# EAGLE board heart-pcb-schaltung (EAGLE 9.7.0)

Size 221.15 x 68.41 mm. Coordinates in mm from the lower left corner, seen from the top.
Outline: 0,0 221.15,0 221.15,68.41 0,68.41 0,0
Copper layers (1*16): Top 0.035mm / dielectric 1.5mm / Bottom 0.035mm
Design rules "default": minimum track width 6mil, minimum drill 0.35mm, track to track 6mil, track to pad 6mil, pad to pad 6mil, via to via 6mil, smd to smd 6mil, copper to edge 40mil, drill to drill 6mil, minimum pad ring 10mil, minimum via ring 8mil, stop-mask expansion 4mil, vias tented up to drill 0mil, thermal gap 10mil

## Footprints (pad centres in the part's own frame; a part is rotated, then mirrored left to right if it is on the bottom)
BAT_3002 = smd 3.96 x 3.96: N 0,0.65 | smd 5.08 x 5.08: P 12.825,0.65; P1 -12.825,0.65
BATTERY-GENERIC = drill 1.118 pad 3.15 octagon: + 2.54,0; - -2.54,0
LEDRD254W60D565H860B = drill 0.981 pad 1.581: 1 -1.27,0; 2 1.27,0
MOTOR = drill 1.118 pad 3.15 octagon: + 2.54,0; - -2.54,0
RESAD1016W63L850D250B = drill 0.83 pad 1.43: 1 -5.08,0; 2 5.08,0
DIP787W55P254L958H533Q8B-8P3 = drill 0.852 pad 1.452: 1 -3.81,3.81; 2 -3.81,1.27; 3 -3.81,-1.27; 4 -3.81,-3.81; 5 3.81,-3.81; 6 3.81,-1.27; 7 3.81,1.27; 8 3.81,3.81
TO92 = drill 0.813 octagon: 1 -1.27,0; 2 0,1.905; 3 1.27,0

## Placement (x,y rotation side)
BAT1  BR2016  [BAT_3002]  200.96,15.43 0 top
BAT5  BR2016  [BAT_3002]  17.33,35.78 90 top
BAT8  3V  [BATTERY-GENERIC]  8.26,60.15 270 top
D1  RED  [LEDRD254W60D565H860B]  203.4,34.47 270 top
D4  RED  [LEDRD254W60D565H860B]  89.27,51.06 180 top
M1  MOTOR_HDR  [MOTOR]  212.09,44.26 90 top
M3  MOTOR_HDR  [MOTOR]  66.41,33.28 0 top
R2  20  [RESAD1016W63L850D250B]  210.25,33.22 0 top
R3  10  [RESAD1016W63L850D250B]  202.57,39.47 0 top
R4  20  [RESAD1016W63L850D250B]  85.46,45.98 0 top
R5  100k  [RESAD1016W63L850D250B]  95.62,35.82 270 top
R6  10k  [RESAD1016W63L850D250B]  80.38,20.58 270 top
U1  ATtiny25-20PU  [DIP787W55P254L958H533Q8B-8P3]  76.57,37.09 90 top
U2  TMP36GT9Z_TO92  [TO92]  98.16,51.06 0 top

## Library data of the parts
BAT1 BAT5 = Tinkercad; CATEGORY: Battery-Holder; CELL_DIAMETER: 20mm; DESCRIPTION: Battery Retainer Coin, 20.0mm 1 Cell SMD (SMT) Tab; MANUFACTURER: Keystone Electronics; MPN: 3002; PART_STATUS: ACTIVE; ROHS_COMPLIANT: COMPLIANT; SERIES: -; SUB_CATEGORY: Holder; TYPE: Coin Cell
BAT8 M1 M3 R2-R6 U2 = Tinkercad
D1 D4 = Tinkercad; CATEGORY: Opto-Electronic; SUB-CATEGORY: LED; VALUE: LED_RED
U1 = Tinkercad; CATEGORY: IC_Embedded; CORE: AVR; DESCRIPTION: AVR AVR® ATtiny, Functional Safety (FuSa) Microcontroller IC 8-Bit 20MHz 2KB (1K x 16) FLASH 8-PDIP; MANUFACTURER: Microchip Technology; MPN: ATtiny25-20PU; OPERATING_TEMP: -40°C to 85°C; PART_STATUS: Active; ROHS_COMPLIANT: COMPLIANT; SERIES: ATtiny25; SPEED: 20 MHz; SUB-CATEGORY: Microcontroller; TYPE: AVR Microcontroller

## Nets
BAT1+: BAT1.P BAT1.P1 D1.1 M1.+
BAT1-: BAT1.N R3.1
BAT8+: BAT8.+ R5.2 U1.8
BAT8-: BAT8.- D4.2 M3.- R6.2 U2.1
D1_C: D1.2 R2.1
D4_A: D4.1 R4.2
M1_-: M1.- R3.2
U1_GND: R6.1 U1.4
U1_PB0: R4.1 U1.5
U1_PB1: U1.6 U2.2
U1_PB3: M3.+ U1.2
U2_+VS: R5.1 U2.3

## Tracks (layer width: path | path; a pad name or v marks a point on that pad's centre or on a via)
BAT1+  (3 unrouted)
BAT1-  (1 unrouted)
BAT8+  (2 unrouted)
BAT8-  (4 unrouted)
D1_C  (1 unrouted)
D4_A  (1 unrouted)
M1_-  (1 unrouted)
U1_GND  (1 unrouted)
U1_PB0  (1 unrouted)
U1_PB1  (1 unrouted)
U1_PB3  (1 unrouted)
U2_+VS  (1 unrouted)